# Altium PCB S6_Main_hv3.PcbDoc
Units mm, origin at the board's own origin, x right, y up, seen from the top; angles counter-clockwise.
Board outline 75 x 64 mm, 4 copper layers (Top Layer, GND, VCC, Bottom Layer), stack 1.606 mm thick; 128 components, 72 nets, 443 pads, 232 vias.
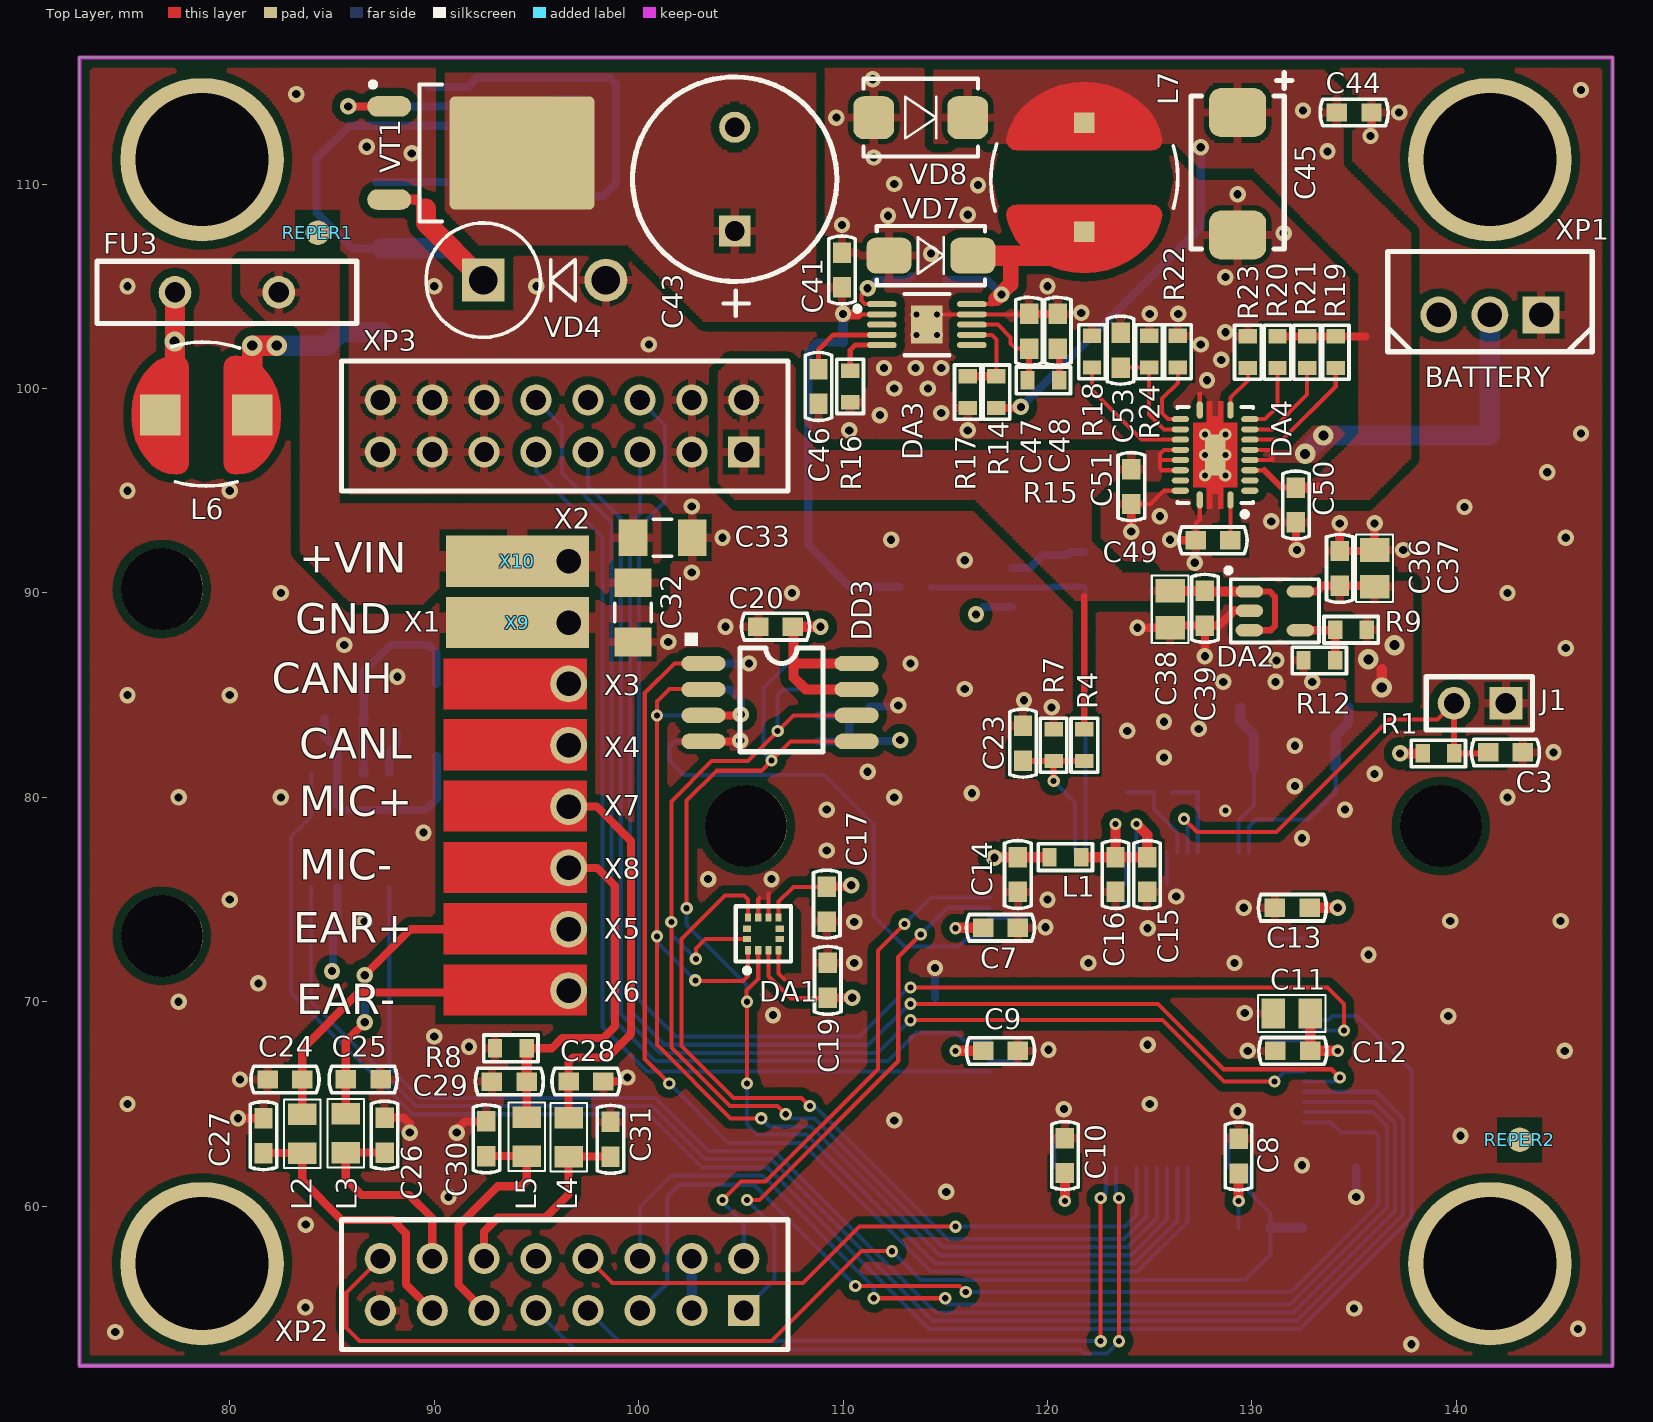
[diagram p0: Top Layer view]
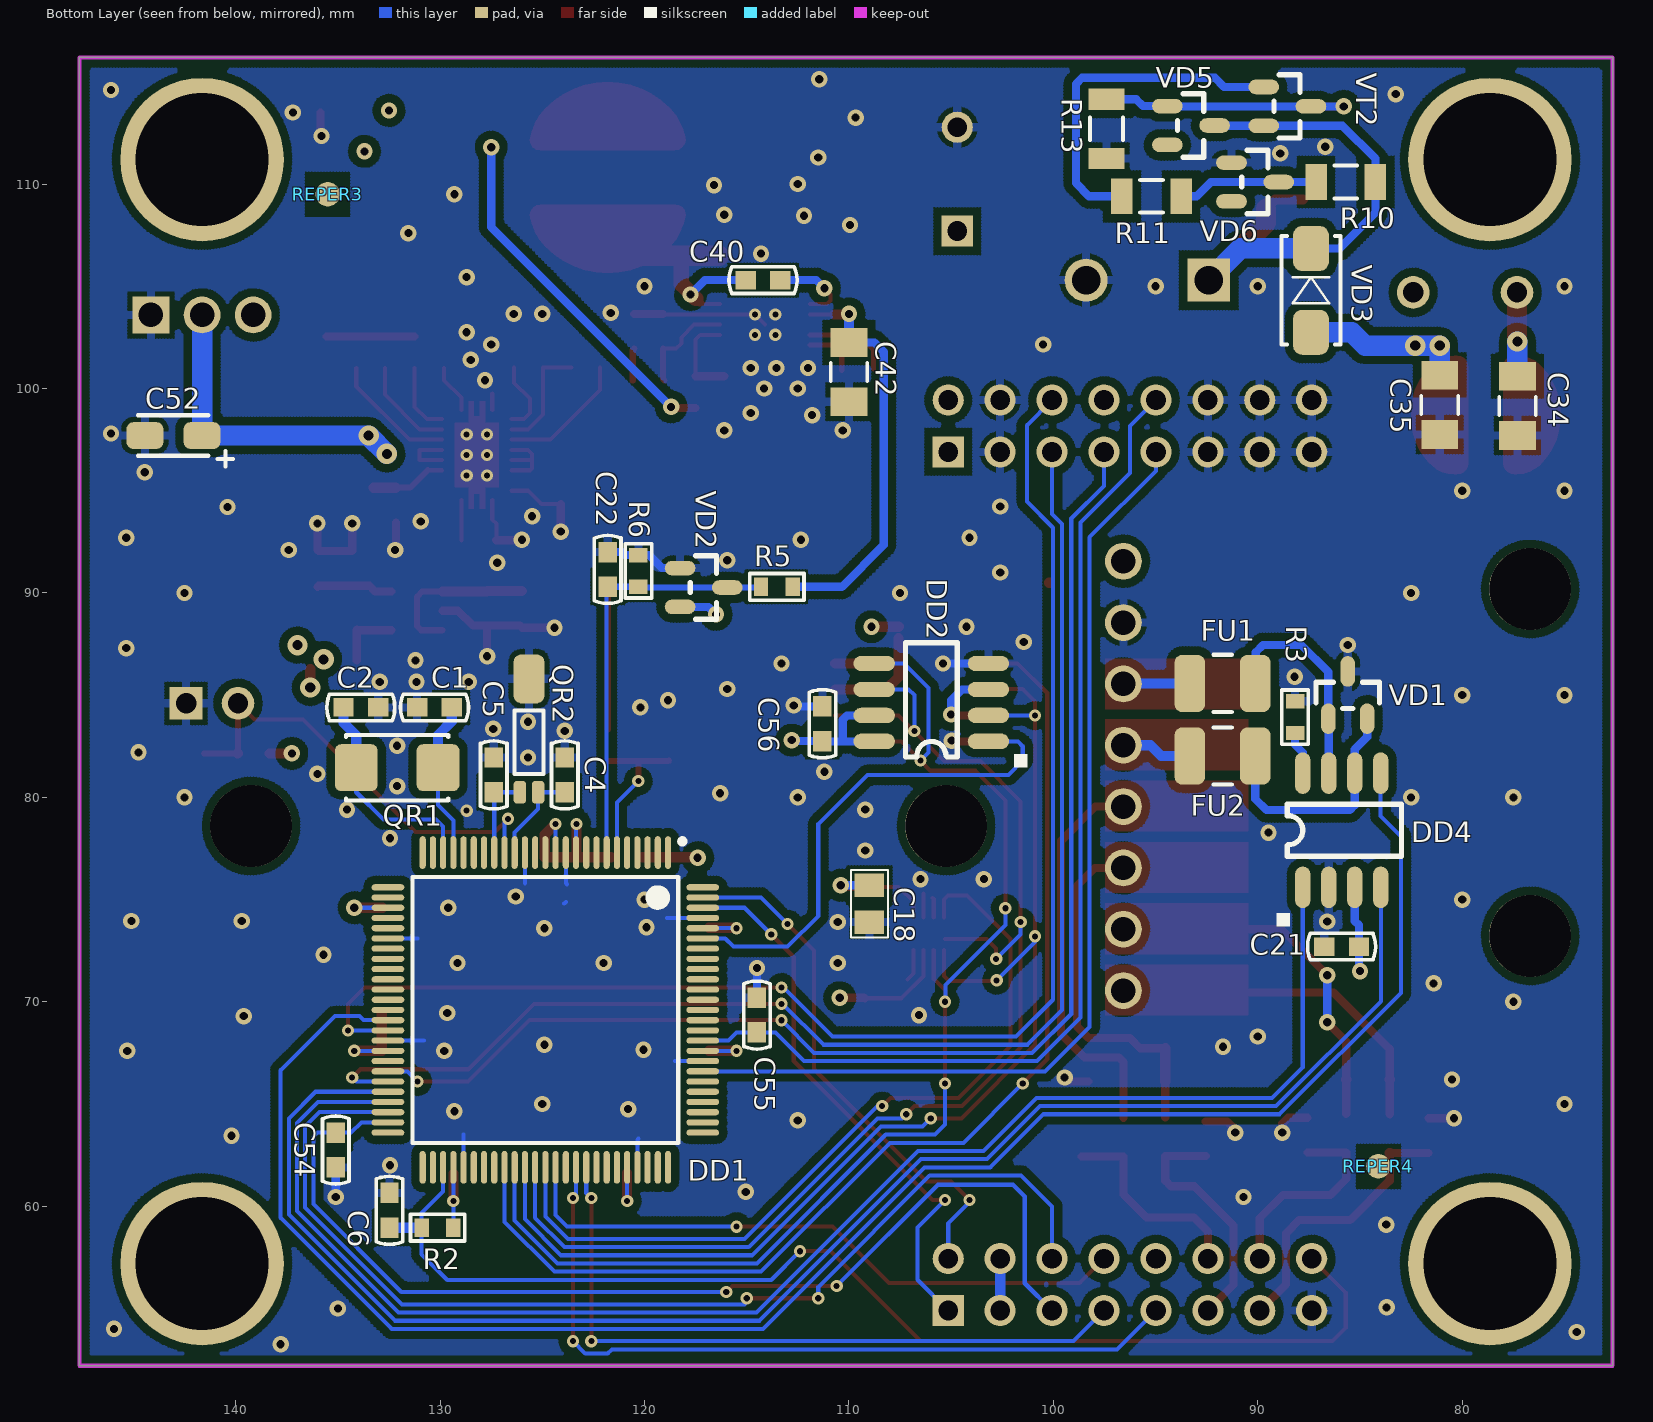
[diagram p1: Bottom Layer view, seen from below]
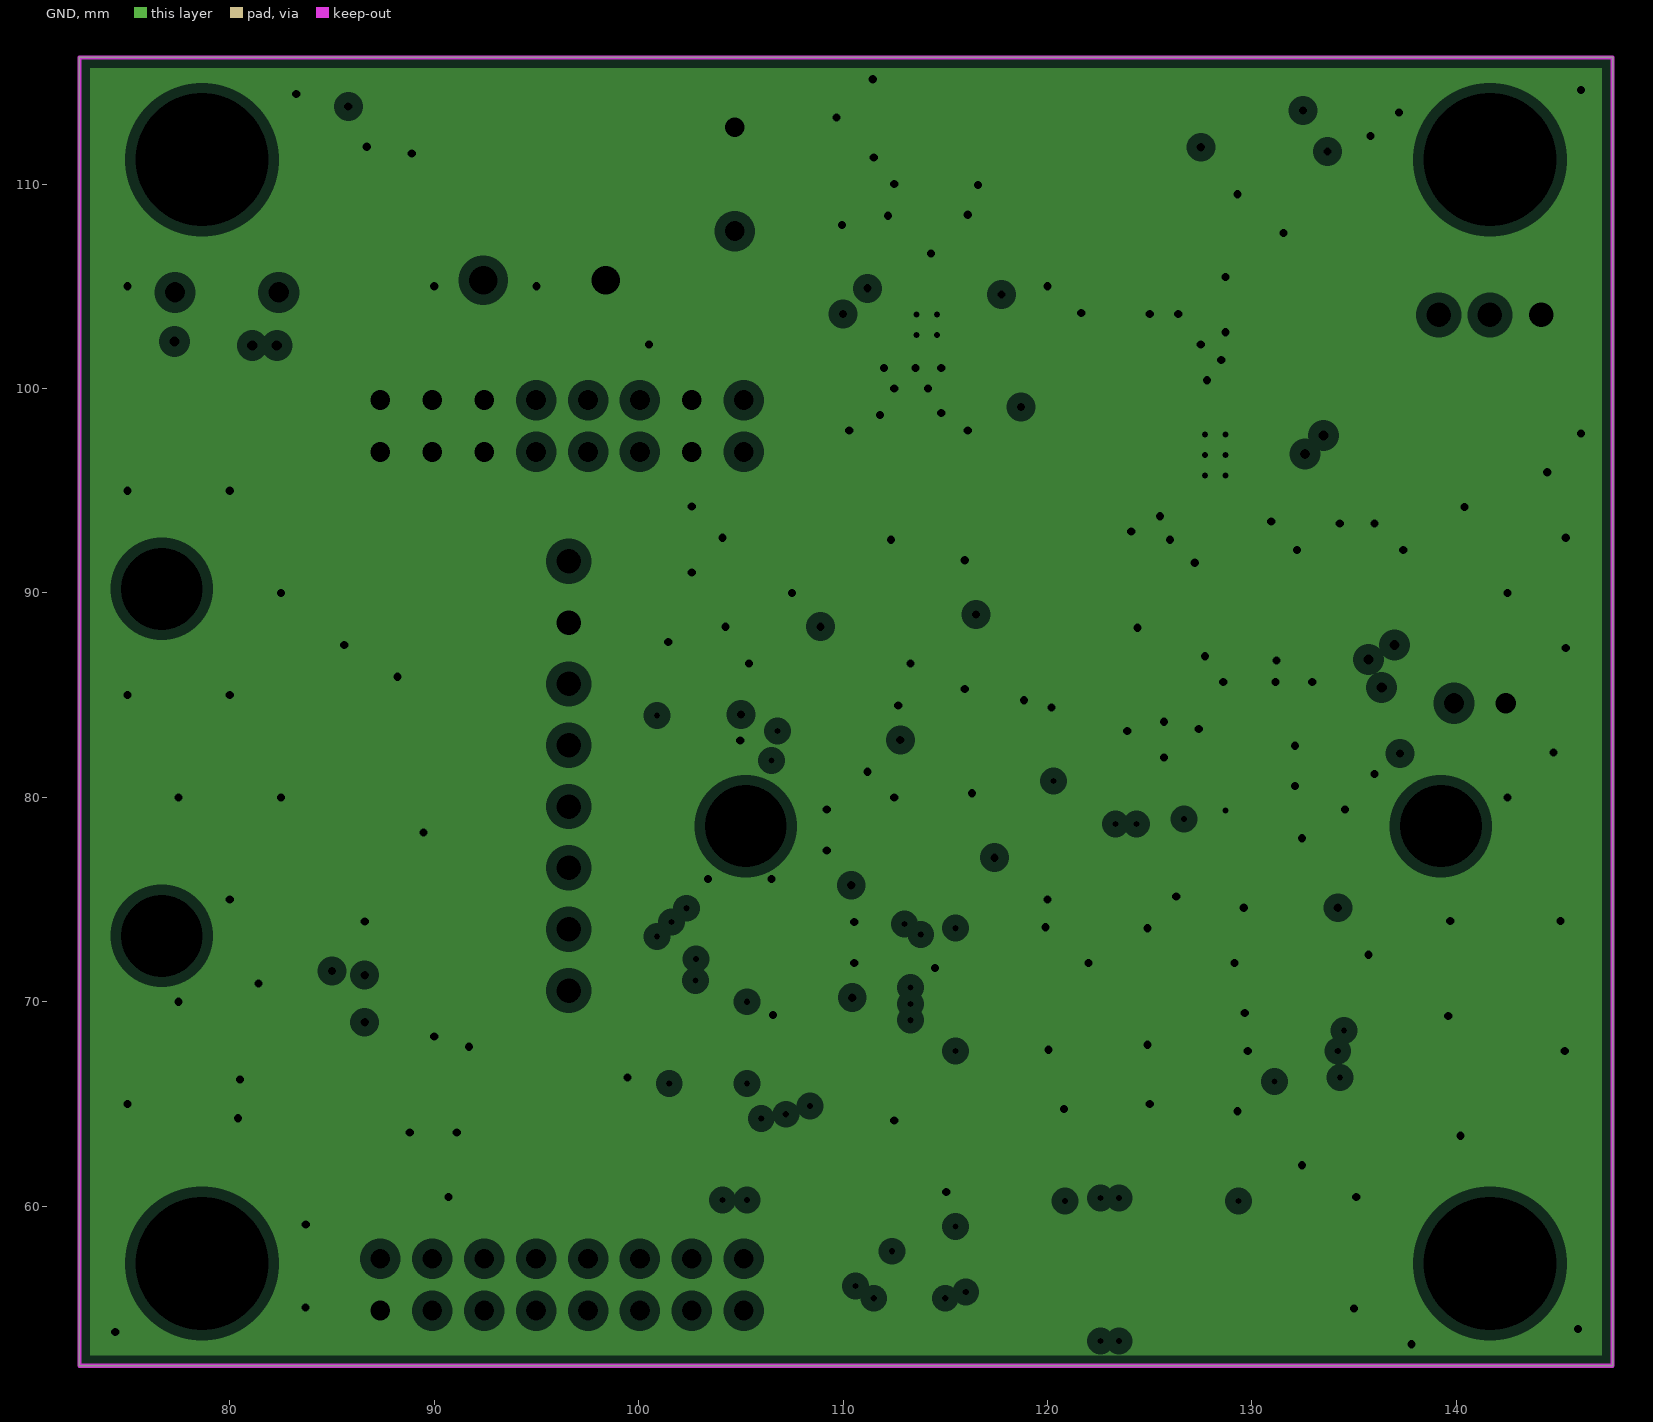
[diagram p2: GND, clearances drawn from the general rule]
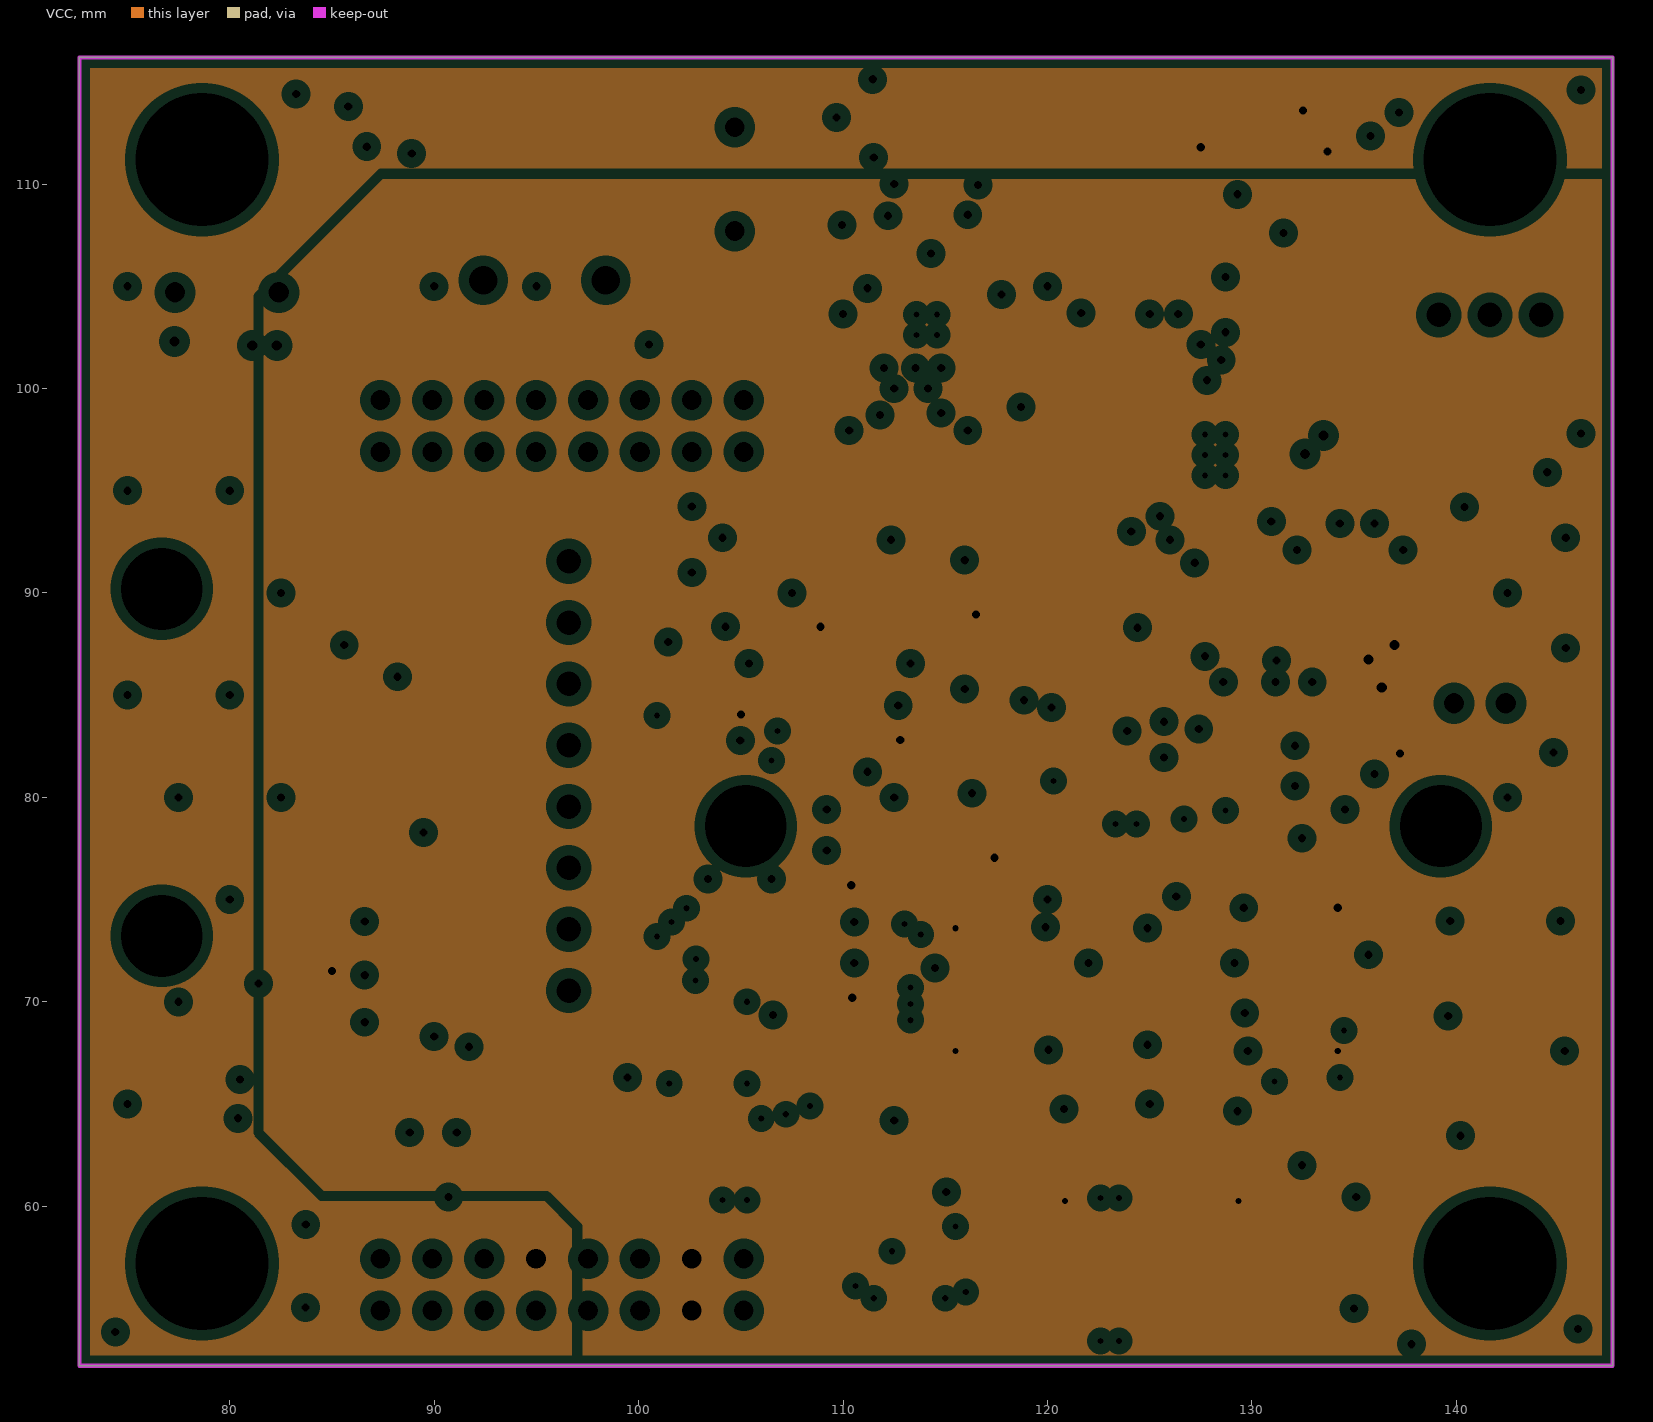
[diagram p3: VCC, clearances drawn from the general rule]

## Layer stack, top to bottom
Top Solder: solder mask 0.0102, Solder Resist, Dk 3.5
Top Layer: signal copper 0.035
Dielectric 1: prepreg 0.25, FR-4, Dk 4.2
GND: plane copper 0.018, net GND
Dielectric 3: core 1, FR-4, Dk 4.2
VCC: plane copper 0.018, net (Multiple Nets)
Dielectric 2: prepreg 0.25, FR-4, Dk 4.2
Bottom Layer: signal copper 0.035
Bottom Solder: solder mask 0.0102, Solder Resist, Dk 3.5

## Board outline
72.644,52.197 147.644,52.197 147.644,116.197 72.644,116.197

## Design rules (kind name [scope] priority, off if disabled: settings)
Clearance Clearance_keepout [IsKeepOut] p1: gap=0.4 ignorepadtopadclearanceinfootprint=FALSE
Clearance Clearance_Poly [All vs InPoly] p2: gap=0.4 ignorepadtopadclearanceinfootprint=FALSE
Clearance [All] p3: gap=0.2 ignorepadtopadclearanceinfootprint=FALSE
ComponentClearance [All] p1: gap=0 collisioncheckmode=3 verticalgap=0 showdistances=FALSE
HoleSize [All] p1: absolutevalues=TRUE maxlimit=10 minlimit=0.025 maxpercent=80.000 minpercent=20.000
PlaneClearance [All] p1: clearance=0.508
PlaneConnect [All] p1: planeconnectstyle=Relief reliefexpansion=0.2 reliefentries=4 reliefconductorwidth=0.254 reliefairgap=0.2
PolygonConnect PolygonConnect_2 [IsPad And (PadYSize_TopLayer > 1.5) And InComponent(DA3)] p1: connectstyle=Direct reliefconductorwidth=0.254 reliefentries=4 polygonreliefangle="90 Angle" airgapwidth=0.254
PolygonConnect PolygonConnect_3 [InComponent('X9') OR InComponent('X10')] p2: connectstyle=Relief reliefconductorwidth=1 reliefentries=4 polygonreliefangle="90 Angle" airgapwidth=0.3
PolygonConnect PolygonConnect_1 [All vs IsVia OR InComponent('L6') OR InComponent('VT1') AND InNet('VIN_F')] p3: connectstyle=Direct reliefconductorwidth=0.254 reliefentries=4 polygonreliefangle="90 Angle" airgapwidth=0.254
PolygonConnect [All] p4: connectstyle=Relief reliefconductorwidth=0.4 reliefentries=4 polygonreliefangle="90 Angle" airgapwidth=0.25
RoutingVias [All] p1: holewidth=0.4 width=0.8 viastyle="Through Hole" minholewidth=0.3 minwidth=0.6 maxholewidth=0.5 maxwidth=1
SilkToSilkClearance [All] p1: silktosilkclearance=0
SolderMaskExpansion SolderMaskExpansion_via [IsVia] p1: expansion=-10
SolderMaskExpansion [All] p2: expansion=0.076
Width [All] p1: maxlimit=3 minlimit=0.2 preferedwidth=0.5
25 further rules are at their usual default settings.

## Classes and differential pairs
component class Power: C32 C33 C34 C35 C36 C37 C38 C39 C40 C41 C42 C43 C44 C45 C46 C47 C48 C49 C50 C51 C52 C53 DA2 DA3 DA4 FU3 L6 L7 R9 R10 R11 R12 R13 R14 R15 R16 R17 R18 R19 R20 R21 R22 R23 R24 VD3 VD4 VD5 VD6 VD7 VD8 VT1 VT2 XP1
component class IO: C17 C18 C19 DA1 X1 X2 X3 X4 X5 X6 X7 X8 X9 X10 XP2 XP3
component class Interface: C21 C22 C23 C24 C25 C26 C27 C28 C29 C30 C31 DD4 FU1 FU2 L2 L3 L4 L5 R3 R4 R5 R6 R7 R8 VD1 VD2
component class CPU: C1 C2 C3 C4 C5 C6 C7 C8 C9 C10 C11 C12 C13 C14 C15 C16 C20 C54 C55 C56 DD1 DD2 DD3 J1 L1 QR1 QR2 R1 R2 REPER1 REPER2 REPER3 REPER4

## Components (designator, comment, footprint, x,y, rotation, side; value= is the part's Value field where it differs from the comment)
C1 "22pF" CC0603#1 130.275,84.4 r180 bottom
C2 "22pF" CC0603#1 133.875,84.4 r0 bottom
C3 "220pF" CC0603#1 142.4,82.2 r180 top
C4 "22pF" CC0603#1 123.9,81.1 r270 bottom
C5 "22pF" CC0603#1 127.375,81.1 r270 bottom
C6 "220pF" CC0603#1 132.475,59.8 r270 bottom
C7 "0.1uF" CC0603#1 117.7,73.625 r180 top
C8 "0.1uF" CC0603#1 129.35,62.45 r270 top
C9 "0.1uF" CC0603#1 117.7,67.6 r180 top
C10 "0.1uF" CC0603#1 120.85,62.475 r270 top
C11 "10uF" CC0805 131.95,69.425 r0 top
C12 "0.1uF" CC0603#1 132,67.6 r0 top
C13 "0.1uF" CC0603#1 131.975,74.6 r0 top
C14 "0.1uF" CC0603#1 118.55,76.225 r90 top
C15 "0.1uF" CC0603#1 124.875,76.225 r90 top
C16 "0.1uF" CC0603#1 123.325,76.225 r90 top
C17 "0.1uF" CC0603#1 109.2,74.775 r270 top
C18 "10uF 6.3V" CC0805 109,74.8 r90 bottom
C19 "0.1uF" CC0603#1 109.25,71.05 r90 top
C20 "0.1uF" CC0603#1 106.7,88.35 r180 top
C21 "0.1 uF" CC0603#1 85.9,72.7 r0 bottom
C22 "0.1 uF" CC0603#1 121.8,91.15 r90 bottom
C23 "0.1 uF" CC0603#1 118.8,82.65 r90 top
C24 "1 nF" CC0603#1 82.7,66.2 r0 top
C25 "1 nF" CC0603#1 86.525,66.202 r180 top
C26 "22 pF" CC0603#1 87.575,63.475 r270 top
C27 "22 pF" CC0603#1 81.65,63.45 r270 top
C28 "22 pF" CC0603#1 97.425,66.1 r180 top
C29 "22 pF" CC0603#1 93.675,66.098 r0 top
C30 "1 nF" CC0603#1 92.55,63.3 r270 top
C31 "1 nF" CC0603#1 98.625,63.275 r270 top
C32 "0.1uF" CC1206 99.725,89.05 r90 top
C33 "10nF" CC1206 101.175,92.7 r180 top
C34 "0.1uF" CC1206 77.3,99.15 r90 bottom
C35 "0.1uF" CC1206 81.1,99.2 r90 bottom
C36 "0.1uF" CC0603#1 134.3,91.2 r90 top
C37 "10uF 6.3V" CC0805 136,91.2 r270 top
C38 "10uF 6.3V" CC0805 126,89.2 r90 top
C39 "0.1uF" CC0603#1 127.7,89.25 r270 top
C40 "0.1 uF" CC0603#1 114.2,105.3 r0 bottom
C41 "0.1 uF" CC0603#1 109.95,105.8 r270 top
C42 "1uF 50V" CC1206 110,100.8 r90 bottom
C43 "220uF x 50V" CC16X10_CAP0.5(1)(Primary) 104.7,107.7 r90 top
C44 "0.1 uF" CC0603#1 135,113.5 r0 top
C45 "470uF x 6.3V" TAJ-D-1M 129.3,110.5 r90 top
C46 "10 nF" CC0603#1 108.8,100.1 r90 top
C47 "330pF" CC0603#1 119.1,102.8 r270 top
C48 "560 pF" CC0603#1 120.5,102.8 r270 top
C49 "0.1 uF" CC0603#1 128.1,92.575 r180 top
C50 "1 uF" CC0603#1 132.15,94.3 r270 top
C51 "1 uF" CC0603#1 124.1,95.2 r270 top
C52 "47uF x 6.3V" TAJ-A_M 141.644,97.7 r180 bottom value={Value}
C53 "0.1 uF" CC0603#1 123.575,101.875 r90 top
C54 "33pF" CC0603#2 135.1,62.75 r90 bottom
C55 "33pF" CC0603#2 114.501,69.35 r270 bottom
C56 "0.1uF" CC0603#2 111.3,83.6 r90 bottom
DA1 "KX022-1020" LGA-12 106.1,73.325 r90 top
DA2 "AP2210K-ADJTRG1" SOT23-5 131.125,89.125 r180 top
DA3 "TPS54260DGQ" S-PDSO-G10 111.9,104.125 r270 top
DA4 "BQ24070" P-PQFP-N20 128.2,96.75 r90 top
DD1 "LPC1765FBD100" TQFP-100 118.85,77.3 r270 bottom
DD2 "M95256-WMN6" SO-8#1 103.175,82.74 r90 bottom
DD3 "IS25LP016D-JBLE" EIAJ_SO8 103.175,86.55 r0 top
DD4 "SN65HVD234D" SO-8#2 87.8,75.6 r180 bottom
FU1 "MICROSMD010F-2" RC1210 91.725,85.575 r0 bottom
FU2 "MICROSMD010F-2" RC1210 91.725,82.025 r0 bottom
FU3 "RXE-110" RXE-110 82.4,104.7 r180 top
J1 "PLS-02" PLS-02 142.425,84.6 r180 top
L1 "10uH" L0603 120.1,77.075 r0 top
L2 "BLM21PG221" RC0805 83.55,63.55 r90 top
L3 "BLM21PG221" RC0805 85.675,63.575 r90 top
L4 "BLM21PG221" RC0805 96.575,63.375 r270 top
L5 "BLM21PG221" RC0805 94.525,63.4 r270 top
L6 "47uH" SDR0603 76.6,98.7 r0 top
L7 "15uH" SDR0805 121.8,110.325 r90 top
QR1 "12MHz" AC5032_2 132.1,81.45 r0 bottom
QR2 "MS3V-T1R" MS3V-T1R 126.1,80.25 r90 bottom
R1 "10k" RC0603 139.125,82.15 r0 top
R2 "10k" RC0603 130.125,58.95 r0 bottom
R3 "0" RC0603 88.175,83.925 r90 bottom
R4 "12k 1%" RC0603 121.8,82.55 r90 top
R5 "120k" RC0603 113.525,90.3 r180 bottom
R6 "10k" RC0603 120.3,91.075 r90 bottom
R7 "20k 1%" RC0603 120.3,82.55 r270 top
R8 "1k" RC0603 93.75,67.725 r0 top
R9 "11k 1%" RC0603 134.85,88.2 r0 top
R10 "220k" RC1206 85.7,110.1 r180 bottom
R11 "220k" RC1206 95.2,109.4 r0 bottom
R12 "16k 1%" RC0603 133.3,86.7 r0 top
R13 "220k" RC1206 97.4,112.7 r270 bottom
R14 "48.7k 1%" RC0603 117.5,99.825 r270 top
R15 "12k" RC0603 119.8,100.4 r180 top
R16 "240k" RC0603 110.35,100.1 r90 top
R17 "11k 1%" RC0603 116.1,99.825 r90 top
R18 "51k" RC0603 122.175,101.799 r270 top value={Value}
R19 "100k" RC0603 134.1,101.774 r270 top
R20 "100k" RC0603 131.25,101.774 r270 top
R21 "100k" RC0603 132.7,101.774 r270 top
R22 "10k" RC0603 126.375,101.799 r270 top
R23 "2k" RC0603 129.8,101.774 r270 top
R24 "33k" RC0603 124.975,101.799 r270 top
REPER1 "REPER1.2" REPER1.2 84.3,107.625 r90 top
REPER2 "REPER1.2" REPER1.2 143.1,63.25 r90 top
REPER3 "REPER1.2" REPER1.2 135.5,109.5 r90 bottom
REPER4 "REPER1.2" REPER1.2 84.1,61.95 r90 bottom
VD1 "PESD2CAN" SOT-23(123) 86.55,83.85 r270 bottom
VD2 "BAT54S" SOT-23(GSD) 118.261,91.216 r0 bottom
VD3 "GS1M" SMA 87.4,104.8 r270 bottom value={Value}
VD4 "1.5KE150A" DO-201 98.4,105.3 r180 top
VD5 "BZX84C15" SOT-23(123) 94.424,113.816 r0 bottom value={Value}
VD6 "BZX84C39" SOT-23(123) 91.286,111.05 r0 bottom value={Value}
VD7 "SK34SMA" SMA 114.3,106.5 r180 top value={Value}
VD8 "SMBJ5.0A" SMB 113.8,113.25 r180 top
VT1 "FQD5P20TM" D-PAK(TO-252AA) 92.3,111.52 r0 top
VT2 "BC807-40" SOT-23(123) 89.711,114.75 r0 bottom
X1 "PIN_1.2mm" PIN_1.2mm 96.575,88.55 r0 top
X2 "PIN_1.2mm" PIN_1.2mm 96.575,91.55 r0 top
X3 "PIN_1.2mm" PIN_1.2mm 96.575,85.55 r0 top
X4 "PIN_1.2mm" PIN_1.2mm 96.575,82.55 r0 top
X5 "PIN_1.2mm" PIN_1.2mm 96.575,73.55 r0 top
X6 "PIN_1.2mm" PIN_1.2mm 96.575,70.55 r0 top
X7 "PIN_1.2mm" PIN_1.2mm 96.575,79.55 r0 top
X8 "PIN_1.2mm" PIN_1.2mm 96.575,76.55 r0 top
X9 "PIN_2.5x4mm_SMD" PIN_2.5x4mm_SMD 94.069,88.55 r0 top
X10 "PIN_2.5x4mm_SMD" PIN_2.5x4mm_SMD 94.069,91.55 r0 top
XP1 "MW03D" MW03D 144.144,103.597 r180 top
XP2 "PBD-16" PBD16 105.144,54.897 r180 top
XP3 "PBD-16" PBD16 105.144,96.897 r180 top

## Footprints (in the part's own frame and the unit in brackets; to place one, negate y for a bottom-side part, rotate by r counter-clockwise, add the part's x,y. Pads: shape width x height; smd on the part's side, far side on the other; paste and mask are expansions set on the pad)
AC5032_2 [mm]
  rrect30% 2.1x2.3 smd mask+0.06: 1(-2,0) 2(2,0)
  silkscreen extent -2.5,-1.6 2.5,1.6
CC16X10_CAP0.5(1)(Primary) [mil]
  round 60 hole 38 mask+2.36: 1(200,0)
  rect 60x60 hole 38 mask+2.36: 2(0,0)
  silkscreen extent -97,-197 297,197
CC0603#1 [mm]
  rect 1x0.9 smd paste-25.4 mask+0.06: 1(-0.85,0) 2(0.85,0)
  silkscreen extent -1.66,-0.65 1.66,0.65
CC0603#2 [mm]
  rect 1x0.9 smd paste-25.4: 1(-0.85,0) 2(0.85,0)
  silkscreen extent -1.66,-0.65 1.66,0.65
CC0805 [mm]
  rect 1.15x1.45 smd paste-25.4 mask+0.06: 1(-0.9,0) 2(0.9,0)
  silkscreen extent -1.65,-0.9 1.65,0.9
CC1206 [mm]
  rect 1.4x1.8 smd paste-25.4 mask+0.06: 1(-1.45,0) 2(1.45,0)
  silkscreen extent -0.45,-0.9 0.45,0.9
D-PAK(TO-252AA) [mm]
  oval 2.15x1 smd paste+0.076 mask+0.076: 1(-4.5,2.28) 2(-4.5,-2.28)
  rrect10% 7.1x5.55 smd paste-4: 3(2,0)
  silkscreen extent -5.42,-3.35 -1.92,3.47
DO-201 [mm]
  round 2.1 hole 1.4 mask+0.06: 1(0,0)
  rect 2.1x2.1 hole 1.4 mask+0.06: 2(6,0)
  silkscreen extent 1.5,-2.8 8.8,2.8
EIAJ_SO8 [mil]
  oval 85x29.53 smd mask+2.36: 1(0,0) 2(0,-50) 3(0,-100) 4(0,-150) 5(295,-150) 6(295,-100) 7(295,-50) 8(295,0)
  silkscreen extent -36,-170 230,59
L0603 [mm]
  rect 0.7x0.9 smd paste-25.4 mask+0.06: 1(0,0) 2(1.549,0)
  silkscreen extent -0.55,-0.65 2.1,0.65
LGA-12 [mm]
  rect 0.4x0.3 smd mask+0.06: 1(-0.8,0.75) 2(-0.8,0.25) 3(-0.8,-0.25) 4(-0.8,-0.75) 7(0.8,-0.75) 8(0.8,-0.25) 9(0.8,0.25) 10(0.8,0.75)
  rect 0.3x0.4 smd mask+0.06: 5(-0.25,-0.8) 6(0.25,-0.8) 11(0.25,0.8) 12(-0.25,0.8)
  silkscreen extent -1.92,-1.35 1.35,1.35
MS3V-T1R [mm]
  rrect50% 1.1x0.6 smd mask+0.06: 1(0,0) 2(0,-0.9)
  rrect50% 2.4x1.5 smd mask+0.06: 3(5.55,-0.45)
  silkscreen extent 0.9,-1.15 4,0.25
MW03D [mm]
  rect 1.8x1.8 hole 1.2 mask+0.06: 1(0,0)
  round 1.8 hole 1.2 mask+0.06: 2(2.5,0) 3(5,0)
  silkscreen extent -2.5,-3.1 7.5,1.8
P-PQFP-N20 [mm]
  oval 0.85x0.3 smd mask+0.06: 1(-2.2,-0.75) 10(2.2,-0.75) 11(2.2,0.75) 20(-2.2,0.75)
  oval 0.3x0.85 smd mask+0.06: 2(-1.75,-1.7) 3(-1.25,-1.7) 4(-0.75,-1.7) 5(-0.25,-1.7) 6(0.25,-1.7) 7(0.75,-1.7) 8(1.25,-1.7) 9(1.75,-1.7) 12(1.75,1.7) 13(1.25,1.7) 14(0.75,1.7) 15(0.25,1.7) 16(-0.25,1.7) 17(-0.75,1.7) 18(-1.25,1.7) 19(-1.75,1.7)
  rect 2x1 smd paste-25.4 mask+0.06: 21(0,0)
  Top Layer region: -1.575,-1.075 1.575,-1.075 1.575,-0.4 2.625,-0.4 2.625,-0.15 1.9,-0.15 1.9,0.15 2.625,0.15 2.625,0.4 1.575,0.4 1.575,1.075 -1.575,1.075 -1.575,0.4 -2.625,0.4 -2.625,0.15 -1.9,0.15 -1.9,-0.15 -2.625,-0.15 -2.625,-0.4 -1.575,-0.4
  silkscreen extent -3.02,-1.85 2.35,1.85
PBD16 [mil]
  rect 60x60 hole 38 mask+2.36: 1(0,0)
  round 60 hole 38 mask+2.36: 2(0,-100) 3(100,0) 4(100,-100) 5(200,0) 6(200,-100) 7(300,0) 8(300,-100) 9(400,0) 10(400,-100) 11(500,0) 12(500,-100) 13(600,0) 14(600,-100) 15(700,0) 16(700,-100)
  silkscreen extent -85,-175 775,75
PIN_1.2mm [mm]
  round 1.8 hole 1.2 mask+0.06: 1(0,0)
PIN_2.5x4mm_SMD [mm]
  rect 7x2.5 smd paste-10 mask+0.06: 1(0,0)
PLS-02 [mm]
  rect 1.6x1.6 hole 1 mask+0.06: 1(0,0)
  round 1.6 hole 1 mask+0.06: 2(2.54,0)
  silkscreen extent -1.3,-1.3 3.9,1.3
RC0603 [mm]
  rect 0.7x0.9 smd paste-25.4 mask+0.06: 1(-0.775,0) 2(0.774,0)
  silkscreen extent -1.32,-0.65 1.33,0.65
RC0805 [mm]
  rect 1.05x1.4 smd paste-25.4 mask+0.06: 1(-0.95,0) 2(0.95,0)
  silkscreen extent -1.67,-0.89 1.67,0.89
RC1206 [mm]
  rect 1.05x1.75 smd paste-25.4 mask+0.06: 1(-1.45,0) 2(1.45,0)
  silkscreen extent -0.55,-0.8 0.55,0.8
RC1210 [mm]
  rrect50% 1.5x2.8 smd mask+0.06: 1(-1.6,0) 2(1.6,0)
  silkscreen extent -0.45,-1.4 0.45,1.4
REPER1.2 [mm]
  round 1.2 smd paste-25.4 mask+0.06: 1(0,0)
  Top Layer pour cut-out: -1.2,-1.2 1.2,-1.2 1.2,1.2 -1.2,1.2
RXE-110 [mm]
  round 1.6 hole 1 mask+0.06: 1(0,0) 2(5.08,0)
  silkscreen extent -3.81,-1.52 8.89,1.52
S-PDSO-G10 [mm]
  oval 0.3x1.45 smd: 1(0,0) 2(0.5,0) 3(1,0) 4(1.5,0) 5(2,0) 6(2,4.4) 7(1.5,4.4) 8(1,4.4) 9(0.5,4.4) 10(0,4.4)
  rect 1.85x1.55 smd: 11(1,2.2)
  silkscreen extent -0.5,-1.32 2.5,3.3
SDR0603 [mm]
  rect 2x2 smd paste-25.4 mask+0.06: 1(0,0) 2(4.5,0)
  Top Layer region: 3.65,2.9 3.48,2.873 3.327,2.795 3.205,2.673 3.127,2.52 3.1,2.35 3.1,-2.35 3.127,-2.52 3.205,-2.673 3.327,-2.795 3.48,-2.873 3.65,-2.9 3.824,-2.9 4.119,-2.871 4.402,-2.785 4.663,-2.645 4.892,-2.458 5.002,-2.348 5.275,-2.035 5.502,-1.687 5.68,-1.312 5.681,-1.31 5.802,-0.934 5.875,-0.545 5.9,-0.15 5.9,0.183 5.877,0.556 5.807,0.924 5.693,1.28 5.689,1.288 5.505,1.679 5.268,2.04 4.984,2.366 4.908,2.442 4.671,2.637 4.401,2.781 4.107,2.87 3.802,2.9
  Top Layer region: 0.85,-2.9 1.02,-2.873 1.173,-2.795 1.295,-2.673 1.373,-2.52 1.4,-2.35 1.4,2.35 1.373,2.52 1.295,2.673 1.173,2.795 1.02,2.873 0.85,2.9 0.676,2.9 0.381,2.871 0.098,2.785 -0.163,2.645 -0.392,2.458 -0.502,2.348 -0.775,2.035 -1.002,1.687 -1.18,1.312 -1.181,1.31 -1.302,0.934 -1.375,0.545 -1.4,0.15 -1.4,-0.183 -1.377,-0.556 -1.307,-0.924 -1.193,-1.28 -1.189,-1.288 -1.005,-1.679 -0.768,-2.04 -0.484,-2.366 -0.408,-2.442 -0.171,-2.637 0.099,-2.781 0.393,-2.87 0.698,-2.9
  silkscreen extent 0.58,-3.47 3.88,3.57
SDR0805 [mm]
  rect 1x1 smd paste-25.4 mask+0.06: 1(-2.667,0) 2(2.667,0)
  Top Layer region: -1.327,3.319 -1.362,3.503 -1.461,3.66 -1.612,3.771 -1.792,3.818 -1.977,3.797 -2.318,3.69 -2.706,3.535 -3.065,3.321 -3.387,3.053 -3.392,3.047 -3.771,2.627 -4.09,2.16 -4.345,1.654 -4.53,1.119 -4.642,0.565 -4.68,0 -4.642,-0.565 -4.53,-1.119 -4.345,-1.654 -4.09,-2.16 -3.771,-2.627 -3.392,-3.047 -3.381,-3.059 -3.063,-3.323 -2.709,-3.534 -2.325,-3.688 -1.996,-3.791 -1.806,-3.813 -1.62,-3.764 -1.465,-3.65 -1.363,-3.488 -1.327,-3.299
  Top Layer region: 1.327,-3.319 1.362,-3.503 1.461,-3.66 1.612,-3.771 1.792,-3.818 1.977,-3.797 2.318,-3.69 2.706,-3.535 3.065,-3.321 3.387,-3.053 3.392,-3.047 3.771,-2.627 4.09,-2.16 4.345,-1.654 4.53,-1.119 4.642,-0.565 4.68,0 4.642,0.565 4.53,1.119 4.345,1.654 4.09,2.16 3.771,2.627 3.392,3.047 3.381,3.059 3.063,3.323 2.709,3.534 2.325,3.688 1.996,3.791 1.806,3.813 1.62,3.764 1.465,3.65 1.363,3.488 1.327,3.299
  silkscreen extent -1.66,-4.57 1.64,4.57
SMA [mm]
  rrect50% 2.2x1.75 smd: 1(2.05,0) 2(-2.05,0)
  silkscreen extent -2.65,-1.45 2.65,1.45
SMB [mm]
  rrect50% 2x2.1 smd mask+0.06: 1(2.3,0) 2(-2.3,0)
  silkscreen extent -2.8,-1.9 2.8,1.9
SO-8#1 [mil]
  oval 29.53x80 smd: 1(0,0) 2(50,0) 3(100,0) 4(150,0) 5(150,220) 6(100,220) 7(50,220) 8(0,220)
  silkscreen extent -50,-75 190,160
SO-8#2 [mil]
  oval 29.53x80 smd mask+2.36: 1(0,0) 2(50,0) 3(100,0) 4(150,0) 5(150,220) 6(100,220) 7(50,220) 8(0,220)
  silkscreen extent -50,-75 190,160
SOT23-5 [mm]
  oval 1.35x0.6 smd: 1(1.25,-0.95) 2(1.25,0) 3(1.25,0.95) 4(-1.25,0.95) 5(-1.25,-0.95)
  silkscreen extent -2.16,-2.1 2.4,1.55
SOT-23(123) [mm]
  oval 1.5x0.713 smd: 1(0,0) 2(0,1.9) 3(-2.311,0.95)
  silkscreen extent -1.78,-0.6 -0.5,2.5
SOT-23(GSD) [mm]
  oval 1.5x0.713 smd: 1(0,0) 2(0,1.9) 3(-2.311,0.95)
  silkscreen extent -1.78,-0.6 -0.5,2.5
TAJ-A_M [mm]
  rrect50% 1.8x1.3 smd: 1(0,0) 2(-2.794,0)
  silkscreen extent -3.12,-1.52 1.52,0.99
TAJ-D-1M [mm]
  rrect50% 2.4x2.8 smd: 1(2.997,0) 2(-2.997,0)
  silkscreen extent -3.68,-2.67 4.95,2.29
TQFP-100 [mm]
  oval 1.6x0.3 smd mask+0.06: 1(0,0) 2(0,-0.5) 3(0,-1) 4(0,-1.5) 5(0,-2) 6(0,-2.5) 7(0,-3) 8(0,-3.5) 9(0,-4) 10(0,-4.5) 11(0,-5) 12(0,-5.5) 13(0,-6) 14(0,-6.5) 15(0,-7) 16(0,-7.5) 17(0,-8) 18(0,-8.5) 19(0,-9) 20(0,-9.5) 21(0,-10) 22(0,-10.5) 23(0,-11) 24(0,-11.5) 25(0,-12) 51(15.4,-12) 52(15.4,-11.5) 53(15.4,-11) 54(15.4,-10.5) 55(15.4,-10) 56(15.4,-9.5) 57(15.4,-9) 58(15.4,-8.5) 59(15.4,-8) 60(15.4,-7.5) 61(15.4,-7) 62(15.4,-6.5) 63(15.4,-6) 64(15.4,-5.5) 65(15.4,-5) 66(15.4,-4.5) 67(15.4,-4) 68(15.4,-3.5) 69(15.4,-3) 70(15.4,-2.5) 71(15.4,-2) 72(15.4,-1.5) 73(15.4,-1) 74(15.4,-0.5) 75(15.4,0)
  oval 0.3x1.6 smd mask+0.06: 26(1.7,-13.7) 27(2.2,-13.7) 28(2.7,-13.7) 29(3.2,-13.7) 30(3.7,-13.7) 31(4.2,-13.7) 32(4.7,-13.7) 33(5.2,-13.7) 34(5.7,-13.7) 35(6.2,-13.7) 36(6.7,-13.7) 37(7.2,-13.7) 38(7.7,-13.7) 39(8.2,-13.7) 40(8.7,-13.7) 41(9.2,-13.7) 42(9.7,-13.7) 43(10.2,-13.7) 44(10.7,-13.7) 45(11.2,-13.7) 46(11.7,-13.7) 47(12.2,-13.7) 48(12.7,-13.7) 49(13.2,-13.7) 50(13.7,-13.7) 76(13.7,1.7) 77(13.2,1.7) 78(12.7,1.7) 79(12.2,1.7) 80(11.7,1.7) 81(11.2,1.7) 82(10.7,1.7) 83(10.2,1.7) 84(9.7,1.7) 85(9.2,1.7) 86(8.7,1.7) 87(8.2,1.7) 88(7.7,1.7) 89(7.2,1.7) 90(6.7,1.7) 91(6.2,1.7) 92(5.7,1.7) 93(5.2,1.7) 94(4.7,1.7) 95(4.2,1.7) 96(3.7,1.7) 97(3.2,1.7) 98(2.7,1.7) 99(2.2,1.7) 100(1.7,1.7)
  silkscreen extent -0.67,-12.5 14.2,0.82

## Part data
C1 C2 C3 C4 C5 C6 C7 C8 C9 C10 C12 C13 C14 C15 C16 C17 C19 C20 C21 C22 C23 C24 C25 C26 C27 C28 C29 C30 C31 C36 C39 C40 C41 C44 C46 C47 C48 C49 C50 C51 C53 C54 C55 C56: library part CC0603, "CC0603"
C11 C18 C37 C38: library part CC0805, "CC0805"
C32 C33 C34 C35 C42: library part CC1206, "CC1206"
C43: library part CAP0.5(1), "CAP0.5(1)"
C45: library part TAJ-D, "TAJ-D"
C52: library part TAJ-A, "TAJ-A"
DA2: library part MCP1824T-ADJE/OT, "300 mA, Low Voltage, Low Quiescent Current LDO Regulator, 5-Pin SOT-223, Extended Temperature, Tape and Reel", ComponentLink1Description="Manufacturer Link", ComponentLink1URL=http://www.microchip.com, ComponentLink2Description=Datasheet, ComponentLink2URL=http://ww1.microchip.com/downloads/en/DeviceDoc/22070a.pdf, ComponentLink3Description="Packaging Specification", ComponentLink3URL=http://ww1.microchip.com/downloads/en/PackagingSpec/00049AW.pdf, DatasheetVersion="revA, Aug-2007", PackageDescription="5-Lead Plastic Small Outline Transistor (DC) [SOT-223]", PackageReference=SOT-223-DC5, PackageVersion="revAW, Oct-2008", Published=29-Jan-2009, Publisher="Altium Limited"
DD1: library part LPC1768FBD100, "Cortex -M3 32-Bit Microcontroller, 512KB Flash, 64KB RAM, 100-Lead LQFP", ComponentLink1Description="Manufacturer Link", ComponentLink1URL=http://www.nxp.com/
DD2: "SPI EEPROM"
DD3: library part S25FL016A0LMFI01, "S25FL016A0LMFI01"
DD4: "CAN Transceiver"
FU1 FU2: library part MICROSMD, "MICROSMD"
L1: library part L0603, "L0603"
L6: library part SDR0603, "SDR0603"
L7: library part SDR0805, "SDR0805"
QR1: library part AC5032_2, "AC5032/2"
QR2: "CRYSTAL_32768 Hz"
R1 R2 R3 R4 R5 R6 R7 R8 R9 R12 R14 R15 R16 R17 R18 R19 R20 R21 R22 R23 R24: library part RC0603, "RC0603"
R10 R11 R13: library part RC1206, "RC1206"
VD1: "TVS for CAN"
VD2: "1.0 Ampere General Purpose Rectifier", ComponentField6="Published 8-Jun-2000, Modified 11-July-2000: SIM Model Added."
VD4: library part 1.5KE, "1.5KE"
VD5 VD6: library part BZX84, "Zener Voltage Regulator Diode"
VD7: "Schottky Rectifier"
VD8: library part SMBJ, "SMBJ"
VT1: library part IRFR9220, "HEXFET Power MOSFET", ComponentField7="Published 8-Jun-2000", OriginalName=IRLML5103
VT2: library part BC857B, "BC857B", ComponentField7="Published 29-Sep-2000", OriginalName=BC846BLT1

## Free pads (board coordinates)
  round 4 hole 4 unplated mask+0.06: 0(76.675,73.225) 0(76.675,90.197) 0(105.244,78.597) 0(139.244,78.597)
  round 8 hole 6.5 unplated mask+0.06: 0(78.644,57.197) 0(78.644,111.197) 0(141.644,57.197) 0(141.644,111.197)

## Via types
v1: diameter 0.8, hole 0.4, Top Layer to Bottom Layer, 170 vias
v2: diameter 0.6, hole 0.3, Top Layer to Bottom Layer, 54 vias
v3: diameter 1, hole 0.5, Top Layer to Bottom Layer, 8 vias

## Nets (pads, with @x,y where several pads share a name; then routed paths per layer and width w, separated by ;. In a path a pad name is that pad's centre, name@x,y a point inside that pad or via, vN(x,y) a via of type N, cw(c..) or ccw(c..) an arc to the next point about the centre after c; other vN are vias at no path point)
+3V: C7.2 C8.2 C9.2 C10.2 C11.2 C12.2 C13.2 C14.2 C17.1 C18.2 C19.1 C20.1 C21.1 C36.1 C37.2 C56.1 DA1.3 DA1.7 DA2.5 DD1.28 DD1.42 DD1.54 DD1.71 DD1.84 DD1.96 DD2.3 DD2.7 DD2.8 DD3.3 DD3.7 DD3.8 DD4.3 L1.1 R1.1 R2.1 R9.2 VD2.2 XP2.3 XP2.4 | length 71.2
  Top Layer w0.2: DA1.3 106.35,71.25 107.425,70.175 C19.1@109.225,70.175 ; DA1.7 106.85,74.9 107.575,75.625 C17.1
  Top Layer w0.4: DD3.3 104.96,84.01 v1(105,84.05) ; C17.1 110.325,75.625 v1(110.4,75.7) ; C19.1@109.225,70.175 C19.1 v1(110.45,70.2) ; DA2.5 133.175,90.075 133.45,90.35 C36.1 135.95,90.35 C37.2
  Top Layer w0.5: C20.1 v1(108.9,88.35) ; 107.575,87.8 107.575,86.55 ; DD3.7 108.17,85.28 107.575,85.875 107.575,86.55 ; DD3.8 107.575,86.55 ; v2(115.5,67.6) C9.2 ; v2(115.5,73.6) 115.525,73.625 C7.2 ; v1(117.4,77.05) 117.425,77.075 C14.2 L1.1 ; v2(120.85,60.25) C10.2 ; v2(129.35,60.25) C8.2 ; C13.2 v1(134.2,74.6) ; C11.2 C12.2 v2(134.2,67.6) ; v3(136.35,85.375) 136.35,86.275 ; v1(137.25,82.15) R1.1
  Bottom Layer w0.2: v2(115.5,67.6) DD1.84 ; v2(115.5,73.6) DD1.96 ; v2(120.85,60.25) DD1.71 ; R2.1 v2(129.35,60.25) DD1.54 ; DD1.42 v2(134.2,67.6) ; DD1.28 v1(134.2,74.6)
  Bottom Layer w0.4: v1(85,71.5) 85.05,71.55 C21.1 85.05,73.75 85.26,73.96 DD4.3 ; DD2.3 104.47,85.28 105,84.75 v1(105,84.05) ; DD2.8 110.3,82.74 ; DD2.7 110.09,84.01 110.3,83.8 110.3,82.74 ; C18.2 v1(110.4,75.7) ; v1(112.8,82.8) 112.75,82.75 C56.1 111.29,82.74 110.3,82.74 ; v1(116.5,88.95) 116.866,89.316 VD2.2
  Bottom Layer w0.5: XP2.3 XP2.4
  other v3: 135.7,86.75 136.975,87.45
CAN_D: DD1.47 DD4.1 | length 74.2
  Bottom Layer w0.2: DD4.1 87.8,66.8 89.3,65.3 100.82,65.3 103.42,62.7 106.631,62.7 114.531,54.8 132.031,54.8 137,59.769 137,64.066 135.966,65.1 DD1.47
CAN_EN: DD1.39 DD4.5 | length 88.7
  Bottom Layer w0.2: DD4.5@83.95,81.148 DD4.5 83.99,79.085 83,78.095 83,70.434 88.934,64.5 100.489,64.5 103.089,61.9 106.3,61.9 114.2,54 132.363,54 137.8,59.437 137.8,66.65 135.15,69.3 133.95,69.3 133.75,69.1 DD1.39
CAN_R: DD1.46 DD4.4 | length 77.7
  Bottom Layer w0.2: DD4.4 83.975,75.615 83.975,70.025 89.1,64.9 100.655,64.9 103.255,62.3 106.466,62.3 114.366,54.4 132.197,54.4 137.4,59.603 137.4,64.3 136.1,65.6 DD1.46
CANH: FU1.2 X3.1 | length 3.4
  Bottom Layer w0.5: FU1.2@93.403,85.497 FU1.2 96.55,85.575 X3.1
CANL: FU2.2 X4.1 | length 3.5
  Bottom Layer w0.5: FU2.2 94.725,82.025 95.25,82.55 X4.1
EAR_HF+: C26.2 L3.1 XP2.14 | length 10.2
  Top Layer w0.4: C26.2 L3.1 85.675,61.325 86.45,60.55 88.775,60.55 89.904,59.421 XP2.14
EAR_HF-: C27.2 L2.1 XP2.13 | length 13.7
  Top Layer w0.4: C27.2 L2.1 83.55,61.25 85.475,59.325 87.975,59.325 88.626,58.674 88.626,56.175 XP2.13
GND: C1.1 C2.1 C3.1 C4.1 C5.1 C6.1 C7.1 C8.1 C9.1 C10.1 C11.1 C12.1 C13.1 C14.1 C15.1 C16.1 C17.2 C18.1 C19.2 C20.2 C21.2 C22.2 C23.2 C24.1 C25.1 C26.1 C27.1 C28.1 C29.1 C30.1 C31.1 C32.1 C33.1 C34.1 C35.1 C36.2 C37.1 C38.1 C39.2 C41.1 C42.1 C43.1 C44.2 C45.2 C46.1 C47.1 C48.1 C49.2 C50.2 C51.2 C52.2 C53.2 C54.1 C55.1 C56.2 DA1.4 DA1.8 DA1.9 DA2.2 DA3.9 DA3.11 DA4.11 DA4.19 DA4.20 DA4.21 DD1.11 DD1.15 DD1.31 DD1.41 DD1.55 DD1.72 DD1.83 DD1.97 DD2.4 DD3.4 DD4.2 J1.1 QR2.3 R3.2 R6.2 R7.1 R8.1 R12.1 R13.2 R16.1 R17.1 R18.1 R22.1 R23.1 R24.1 VD1.3 VD2.1 VD4.1 VD6.1 VD7.1 VD8.1 X1.1 X9.1 XP1.1 XP2.15 XP3.3 XP3.4 XP3.11 XP3.12 XP3.13 XP3.14 XP3.15 XP3.16 | length 63.8
  Top Layer w0.2: DA1.9 105.85,75.025 105.9,75.075 ; DA1.8 106.35,75.287 ; DA1.4 106.85,71.386 107.137,71.1 ; DA3.11 v2(114.6,103.625) DA3.9 119.075,103.625 C47.1 ; C51.2 125.05,94.35 125.7,95 DA4.19 ; C49.2 127.25,93.4 127.45,93.6 DA4.20 ; DA4.11 127.45,99.756
  Top Layer w0.4: v1(80.4,64.3) C27.1 ; C26.1 88.525,64.325 88.8,64.05 v1(88.8,63.6) ; v1(91.1,63.6) 91.1,63.75 91.5,64.15 C30.1 ; C28.1 99.6,66.1 99.45,66.25 v1(99.45,66.3) ; DD3.4 104.94,82.74 v1(104.975,82.775) ; C47.1 C48.1 ; v1(124.1,93) C51.2 ; v1(124.4,88.3) C38.1 126.1,88.4 C39.2 ; v1(126,92.6) 126.025,92.575 C49.2 ; v1(127.7,86.9) C39.2 ; DA2.2 129.125,89.125 128.4,88.4 C39.2 ; C50.2 132.15,92.15 v1(132.2,92.1) ; v1(134.3,93.4) C36.2 135.95,92.05 C37.1 v1(136,93.4) ; v1(135.8,112.35) 135.85,112.4 C44.2
  Bottom Layer w0.2: DD1.83 118.5,67.1 ; DD1.97 118.9,74.1 ; 120.3,63.3 120.35,63.25 DD1.72 ; 123.8,75.75 123.85,75.8 DD1.11 ; 123.85,74.875 123.925,74.8 ; 125.85,75.801 DD1.15 ; DD1.55 128.85,63.499 ; 130.8,68.1 DD1.41 ; 131.1,73.1 DD1.31
  Bottom Layer w0.4: DD2.4 v1(105.4,86.55) ; C56.2 112.65,84.45 v1(112.7,84.5) ; C55.1 v1(114.501,71.65) ; VD2.1 119.139,91.216 119.773,91.849 R6.2 120.949,91.849 121.1,92 C22.2 ; v1(135.1,60.45) C54.1
  other v1: 137.8,53.25 74.4,53.85 145.95,54 135,55 83.7,55.05 83.716,59.1 90.7,60.45 115.05,60.7 132.45,62 140.2,63.45 112.5,64.2 129.3,64.65 120.801,64.75 75,65 125,65 80.5,66.2 129.8,67.6 145.3,67.6 120.051,67.65 91.7,67.8 124.9,67.9 90,68.3 139.6,69.3 106.575,69.35 129.65,69.45 77.5,70 81.4,70.9 110.55,71.9 122,71.9 129.15,71.9 135.7,72.3 124.9,73.6 119.901,73.65 110.55,73.9 86.6,73.925 139.7,73.95 145.1,73.95 129.6,74.6 80,75 120,75 126.3,75.15 103.4,76 106.5,76 109.2,77.4 132.45,78 89.475,78.275 109.2,79.4 134.55,79.4 77.5,80 82.5,80 112.5,80 142.5,80 116.3,80.2 132.1,80.55 136,81.15 111.2,81.25 125.7,81.95 144.75,82.2 132.1,82.525 123.9,83.25 127.4,83.35 125.7,83.7 120.2,84.4 118.851,84.75 75,85 80,85 115.95,85.3 128.6,85.65 131.15,85.65 132.95,85.65 88.2,85.9 113.3,86.55 131.2,86.7 145.35,87.3 85.6,87.45 101.45,87.6 104.25,88.35 82.5,90 107.5,90 142.5,90 102.6,91 127.2,91.475 115.95,91.6 137.4,92.1 112.35,92.6 104.1,92.7 145.35,92.7 130.95,93.5 125.5,93.75 140.4,94.2 102.6,94.225 75,95 80,95 144.45,95.9 146.1,97.8 110.3,97.95 116.1,97.95 111.8,98.7 114.8,98.8 112.5,100 114.15,100 127.8,100.4 112,101 113.55,101 114.8,101 128.5,101.4 100.5,102.15 127.5,102.15 128.7,102.75 125,103.65 126.4,103.65 121.65,103.7 75,105 90,105 95,105 120,105 128.7,105.45 114.3,106.6 131.55,107.6 109.95,108 112.2,108.45 116.1,108.5 129.3,109.5 116.6,109.95 112.5,110 111.5,111.3 88.9,111.5 86.7,111.827 109.675,113.25 137.2,113.5 83.25,114.4 146.1,114.6 111.45,115.123
  other v2: 128.7,79.35 127.7,95.75 128.7,95.75 127.7,96.75 128.7,96.75 127.7,97.75 128.7,97.75 113.6,102.625 114.6,102.625 113.6,103.625
GPS_ON: DD1.67 XP2.7 | length 34.3
  Top Layer w0.2: v2(122.6,53.4) v2(122.6,60.4)
  Bottom Layer w0.2: XP2.7 99.021,53.4 v2(122.6,53.4) ; v2(122.6,60.4) 122.85,60.65 DD1.67
GPS_RST: DD1.64 XP2.8 | length 31
  Top Layer w0.2: XP2.8 98.711,56.25 108.05,56.25 110.8,59 v2(115.5,59)
  Bottom Layer w0.2: v2(115.5,59) 123.784,59 124.35,59.566 DD1.64
GPS_RX: DD1.48 XP2.6 | length 53.3
  Top Layer w0.2: v2(111.5,55.5) v2(115,55.5)
  Bottom Layer w0.2: XP2.6 100.064,59.989 101.575,61.5 106.049,61.5 111.5,56.049 v2(111.5,55.5) ; v2(115,55.5) 114.8,55.5 115.1,55.2 131.866,55.2 136.6,59.934 136.6,63.9 135.9,64.6 DD1.48
GPS_TX: C54.2 DD1.49 XP2.5 | length 52.4
  Top Layer w0.2: v2(110.6,56.1) 115.7,56.1 v2(116,55.8)
  Bottom Layer w0.2: XP2.5 101.4,56.233 101.4,60.475 101.975,61.05 105.65,61.05 v2(110.6,56.1) ; v2(116,55.8) 131.9,55.8 136.2,60.1 136.2,63.4 136,63.6 C54.2 134.35,63.6 133.85,64.1 DD1.49
GSM_ON: DD1.45 XP3.5 | length 67.1
  Top Layer w0.2: v2(113.3,69.9) 125.4,69.9 128.6,66.7 133.9,66.7 v2(134.3,66.3)
  Bottom Layer w0.2: XP3.5 100.064,93.864 99.575,93.375 99.575,69.598 101.273,67.9 111.251,67.9 113.251,69.9 v2(113.3,69.9) ; DD1.45 134.1,66.1 v2(134.3,66.3)
H+: C25.2 L3.2 X5.1 | length 13
  Top Layer w0.4: L3.2 C25.2 85.675,68.05 v1@86.6,68.975 ; v1(86.6,71.3) 88.85,73.55 91.525,73.55
  Top Layer w0.5: v1@86.6,68.975 v1(86.6,69)
  Bottom Layer w0.4: v1(86.6,69) v1(86.6,71.3)
H-: C24.2 L2.2 X6.1 | length 13.1
  Top Layer w0.4: L2.2 C24.2 83.55,67.7 86.3,70.45 92.325,70.45
M+: C28.2 L4.1 X7.1 | length 19.7
  Top Layer w0.4: X7.1@96.5,79.775 96.725,79.55 97.95,79.55 99.625,77.875 99.625,68.425 98.475,67.275 96.8,67.275 96.575,67.05 C28.2 L4.1
M-: C29.2 L5.1 R8.2 X8.1 | length 17.7
  Top Layer w0.4: L5.1 C29.2 ; R8.2 95.75,67.725 96.25,68.225 98.275,68.225 98.85,68.8 98.85,75.675 97.975,76.55 X8.1
  Top Layer w0.5: C29.2@94.524,66.098 R8.2
MIC_HF+: C31.2 L4.2 XP2.12 | length 10.1
  Top Layer w0.4: XP2.12 92.444,58.769 93.125,59.45 95.45,59.45 96.575,60.575 L4.2 C31.2
MIC_HF-: C30.2 L5.2 XP2.11 | length 12.1
  Top Layer w0.4: XP2.11 91.182,56.159 91.182,59.057 93.1,60.975 94.25,60.975 94.525,61.25 L5.2 C30.2
MISO: DA1.1 DD1.61 DD2.2 DD3.2 | length 61
  Top Layer w0.2: v2(102.775,71.05) 102.8,71.025 105.114,71.025 105.35,71.261 DA1.1 ; DD3.2 103.155,85.3 101.5,85.3 100.9,84.7 v2(100.9,84) v2(100.9,73.2) 100.9,67.9 104.5,64.3 v2(106,64.3)
  Bottom Layer w0.2: v2(100.9,73.2) 100.9,72.925 v2(102.775,71.05) ; v2(100.9,84) 100.91,84.01 DD2.2 ; v2(106,64.3) 106.4,63.9 108.434,63.9 114.734,57.6 124.081,57.6 125.85,59.369 DD1.61
MOSI: DA1.2 DD1.60 DD2.5 DD3.5 | length 63.5
  Top Layer w0.2: v2(102.35,74.575) 102.35,79.85 103.8,81.3 106,81.3 v2(106.5,81.8) 107.44,82.74 DD3.5 ; v2@105.28,70.003 105.28,70.555 105.85,71.125 DA1.2 ; v2(105.3,66) v2(105.3,70)
  Bottom Layer w0.2: v2(102.35,74.575) 102.35,73.75 105.28,70.82 v2@105.28,70.003 ; v2(105.3,66) 105.3,64 105.8,63.5 108.2,63.5 114.5,57.2 124.247,57.2 126.35,59.303 DD1.60 ; v2(106.5,81.8) 106.1,82.2 106.1,85.35 107.3,86.55 DD2.5
NetC1_2: C1.2 DD1.22 QR1.1 | length 7.7
  Bottom Layer w0.2: DD1.22 129.35,78.875 130.1,79.625 QR1.1
  Bottom Layer w0.5: C1.2 129.425,83.725 130.1,83.05 QR1.1
NetC2_2: C2.2 DD1.23 QR1.2 | length 10.6
  Bottom Layer w0.2: DD1.23 129.85,78.575 130.2,78.925 132.775,78.925 134.1,80.25 QR1.2
  Bottom Layer w0.5: QR1.2 134.1,83.025 134.725,83.65 C2.2
NetC3_2: C3.2 DD1.17 J1.2 R1.2 | length 21.9
  Top Layer w0.2: v2(126.675,78.95) 127.325,78.3 131.2,78.3 136.7,83.8 139.085,83.8 J1.2
  Top Layer w0.3: R1.2@139.885,82.164 J1.2 ; R1.2 C3.2@141.55,82.15
  Top Layer w0.5: R1.2@139.885,82.164 R1.2
  Bottom Layer w0.2: v2(126.675,78.95) 126.85,78.775 DD1.17
NetC4_2: C4.2 DD1.16 QR2.2 | length 4.7
  Bottom Layer w0.2: C4.2@123.9,80.25 QR2.2 125.2,79.425 126.35,78.275 DD1.16
NetC5_2: C5.2 DD1.18 QR2.1 | length 4.2
  Bottom Layer w0.2: QR2.1 127.325,80.25 C5.2@127.35,80.225 ; DD1.18 C5.2@127.35,80.225 ; C5.2 C5.2@127.35,80.225
NetC6_2: C6.2 DD1.53 R2.2 XP2.16 | length 58.7
  Top Layer w0.2: XP2.16 85.7,55.773 85.7,54.05 86.35,53.4 106.5,53.4 110.9,57.8 v2(112.4,57.8)
  Bottom Layer w0.2: v2(112.4,57.8) 113.8,56.4 129.65,56.4 130.9,57.65 R2.2 130.9,59.676 129.85,60.725 DD1.53
  Bottom Layer w0.5: R2.2 C6.2
NetC15_2: C15.2 C16.2 DD1.10 DD1.12 L1.2 | length 9.6
  Top Layer w0.5: L1.2 C16.2 ; v2(123.325,78.7) C16.2 ; v2(124.35,78.7) 124.875,78.175 C15.2 C16.2
  Bottom Layer w0.2: DD1.10 v2@123.35,78.8 ; DD1.12 124.35,78.575 124.3,78.625 124.35,78.675 v2(124.35,78.7)
NetC34_2: C34.2 FU3.2 L6.1 | length 8
  Top Layer w1: L6.1 77.32,99.42 FU3.2
  Bottom Layer w1: C34.2 v3(77.3,102.3)
NetC35_2: C35.2 L6.2 VD3.1 | length 12.6
  Top Layer w1: L6.2 v3(81.1,102.1) v3(82.3,102.1)
  Bottom Layer w1: C35.2 v3(81.1,102.1) v3(82.3,102.1) 84.75,102.1 85.4,102.75 VD3.1
NetC40_1: C40.1 DA3.1 | length 4.2
  Top Layer w0.2: v1(111.2,104.9) 110.9,104.6 110.9,104.3 111.075,104.125 DA3.1
  Bottom Layer w0.4: v1(111.2,104.9) 111.6,105.3 113.15,105.3 C40.1@113.35,105.5
NetC40_2: C40.2 DA3.10 L7.1 VD7.2 | length 12.6
  Top Layer w0.2: DA3.10 117.225,104.125 117.3,104.2
  Top Layer w0.4: 117.3,104.2 v1@117.5,104.4
  Top Layer w0.75: v1@117.5,104.4 118.2,105.1 118.2,106.5
  Top Layer w1: VD7.2 118.2,106.5 120.642,106.5 L7.1
  Bottom Layer w0.4: C40.2 117.05,105.3 v1(117.75,104.6)
NetC46_2: C46.2 DA3.4 | length 4.4
  Top Layer w0.25: C46.2 108.8,101.9 109.525,102.625 DA3.4
NetC47_2: C47.2 DA3.8 R15.2 | length 5
  Top Layer w0.2: DA3.8 117.575,103.125 118.2,102.5 118.2,102.2 118.45,101.95 C47.2
  Top Layer w0.3: R15.2 119.1,100.474 C47.2
NetC48_2: C48.2 R15.1 | length 1.6
  Top Layer w0.3: C48.2 120.575,101.875 R15.1
NetC49_1: C49.1 DA4.1 | length 2
  Top Layer w0.2: C49.1 DA4.1
NetC52_1: C52.1 DA4.5 DA4.6 XP1.2 | length 18
  Top Layer w0.2: DA4.5 130.997,96.5 130.997,97 DA4.6
  Bottom Layer w1: v3(132.6,96.8) v3(133.5,97.7) C52.1 XP1.2
NetC53_1: C53.1 DA4.13 R24.2 | length 5.5
  Top Layer w0.2: C53.1 R24.2 124.975,98.725 125.7,98 DA4.13
NetDA2_4: DA2.4 R9.1 R12.2 | length 3.2
  Top Layer w0.4: DA2.4 134.05,88.175 R9.1 R12.2 R12.2
NetDA3_5: DA3.5 R16.2 | length 2.7
  Top Layer w0.25: R16.2 110.35,101.875 110.6,102.125 DA3.5
NetDA3_7: DA3.7 R14.1 R17.2 | length 4.5
  Top Layer w0.2: DA3.7 117.275,102.625 117.5,102.4 R14.1
  Top Layer w0.4: R17.2 R14.1
NetDA4_7: DA4.7 R19.2 | length 6.2
  Top Layer w0.2: DA4.7 131.5,97.5 134.1,100.1 R19.2
NetDA4_8: DA4.8 R21.2 | length 4.8
  Top Layer w0.2: DA4.8 131,98 132.7,99.7 R21.2
NetDA4_9: DA4.9 R20.2 | length 3.5
  Top Layer w0.2: DA4.9 130.65,98.5 131.25,99.1 R20.2
NetDA4_10: DA4.10 R23.2 | length 2.4
  Top Layer w0.2: DA4.10 128.95,99.55 129.8,100.4 R23.2
NetDA4_12: DA4.12 R22.2 | length 3.6
  Top Layer w0.2: R22.2 126.375,100.275 125.6,99.5 125.6,98.8 125.9,98.5 DA4.12
NetDA4_14: DA4.14 R18.2 | length 6.4
  Top Layer w0.2: R18.2 122.175,99.925 124.6,97.5 DA4.14
NetDD4_6: DD4.6 FU2.1 VD1.2 | length 11.8
  Bottom Layer w0.4: VD1.2 84.65,82.95 85.26,82.34 DD4.6 85.26,79.615 85.5,79.375 89.575,79.375 90.125,79.925 FU2.1
NetDD4_7: DD4.7 FU1.1 VD1.1 | length 10.8
  Bottom Layer w0.4: DD4.7 VD1.1@86.53,83.843 ; VD1.1@86.55,83.863 86.55,86.125 87.875,87.45 89.75,87.45 90.1,87.1 90.1,85.55 FU1.1
  Bottom Layer w0.5: DD4.7 DD4.7@86.55,81.208 ; VD1.1@86.53,83.843 VD1.1@86.55,83.863
NetDD4_8: DD4.8 R3.1 | length 2.1
  Bottom Layer w0.4: DD4.8 87.8,82.2 88.175,82.575 R3.1
NetR10_1: R10.1 R11.1 VD6.3 | length 6.9
  Bottom Layer w0.4: R10.1 VD6.3 92.3,110.1 93,109.4 R11.1
NetR10_2: R10.2 VD3.2 VD4.2 VD5.3 VT1.2 VT2.2 | length 27.3
  Top Layer w0.5: VT1.2 89.16,109.24 89.6,108.8
  Top Layer w1: 89.6,108.8 89.6,108.1 VD4.2
  Bottom Layer w0.4: VD3.2 86,106.85 84.25,108.6 R10.2 84.25,111.25 85.85,112.85 VT2.2 92.097,112.85 VD5.3
  Bottom Layer w1: VD3.2 90.85,106.85 VD4.2
NetR11_2: R11.2 VT2.1 | length 16.9
  Bottom Layer w0.4: VT2.1 91.65,114.75 92.1,115.2 98.6,115.2 98.9,114.9 98.9,110.05 98.25,109.4 R11.2
NetR13_1: R13.1 VD5.1 VT1.1 VT2.3 | length 13.7
  Top Layer w0.4: v1(85.8,113.8) VT1.1
  Bottom Layer w0.4: v1(85.8,113.8) VT2.3 94.395,113.8 94.411,113.816 95.616,113.816 95.95,114.15 R13.1
PWRMON: DD1.40 XP3.6 | length 70.2
  Top Layer w0.2: v2(113.3,70.7) 133.7,70.7 134.5,69.9 v2(134.5,68.6)
  Bottom Layer w0.2: XP3.6 101.3,98.201 101.3,94.464 100.025,93.189 100.025,70.1 101.825,68.3 110.8,68.3 113.2,70.7 v2(113.3,70.7) ; DD1.40 v2(134.5,68.6)
RESET: DD1.44 XP3.7 | length 64.5
  Top Layer w0.2: v2(113.3,69.1) 125.634,69.1 128.634,66.1 v2(131.1,66.1)
  Bottom Layer w0.2: XP3.7 97.524,95.237 99.125,93.636 99.125,69.411 101.036,67.5 111.7,67.5 v2(113.3,69.1) ; v2(131.1,66.1) 131.6,66.6 DD1.44
RXD: C55.2 DD1.85 XP3.10 | length 51.8
  Bottom Layer w0.2: XP3.10 96.25,98.171 96.25,95.875 98.675,93.45 98.675,69.225 100.8,67.1 112.2,67.1 113.6,68.5 C55.2 115.5,68.5 115.9,68.1 DD1.85
RXD0: DD1.99 XP2.2 | length 26
  Top Layer w0.2: v2@104.1,60.223 v2(104.1,60.3) 105,61.2 106.2,61.2 111.7,66.7 111.7,72.5 v2(113,73.8)
  Bottom Layer w0.2: v2(104.1,60.3) 104.1,60.2 105.144,59.156 XP2.2 ; v2(113,73.8) 114.3,75.1 DD1.99
SCK: DA1.12 DD1.62 DD2.6 DD3.6 | length 63.1
  Top Layer w0.2: v2(102.8,72.1) 102.8,72.611 103.264,73.075 DA1.12 ; v2(107.2,64.5) 106.8,64.9 104.466,64.9 101.6,67.766 v2(101.6,73.9) 101.6,79.8 103.575,81.775 105.346,81.775 107.581,84.01 DD3.6
  Bottom Layer w0.2: v2(101.6,73.9) 101.6,73.3 v2(102.8,72.1) ; v2@106.8,83.2 v2(106.8,83.25) 106.8,85 107.08,85.28 DD2.6 ; v2(107.2,64.5) 107.4,64.3 108.6,64.3 114.9,58 123.916,58 125.35,59.434 DD1.62
SS0: DA1.10 DD1.63 | length 39.8
  Top Layer w0.2: DA1.10 105.35,75 105.15,75.2 104.225,75.2 102.1,73.075 102.1,67.831 104.631,65.3 107.975,65.3 v2(108.375,64.9)
  Bottom Layer w0.2: v2(108.375,64.9) 108.6,64.9 115.1,58.4 123.75,58.4 124.85,59.5 DD1.63
SS1: DD1.59 DD3.1 | length 55.9
  Top Layer w0.2: v2(101.5,66) 100.3,67.2 100.3,85.1 101.75,86.55 DD3.1
  Bottom Layer w0.2: v2(101.5,66) 104.4,63.1 108,63.1 114.3,56.8 124.413,56.8 126.85,59.237 DD1.59
SS2: DD1.95 DD2.1 | length 24.7
  Bottom Layer w0.2: DD2.1 101.74,82.74 101.5,82.5 101.5,81.8 102.2,81.1 109.1,81.1 111.5,78.7 111.5,74.2 113,72.7 115.65,72.7 116.05,73.1 DD1.95
STAT_LED: DD1.66 XP2.9 | length 38.2
  Top Layer w0.2: v2(123.5,53.4) v2(123.5,60.4)
  Bottom Layer w0.2: XP2.9 96.881,53 121.6,53 121.8,52.8 122.9,52.8 v2(123.5,53.4) ; DD1.66 123.35,60.55 v2(123.5,60.4)
TXD: DD1.82 XP3.9 | length 49.3
  Bottom Layer w0.2: XP3.9 94.984,95.966 98.225,92.725 98.225,68.775 100.4,66.6 100.734,66.6 112.116,66.6 DD1.82
TXD0: DD1.98 XP2.1 | length 27.3
  Top Layer w0.2: v2(105.3,60.3) 105.901,60.3 112.7,67.099 112.7,72.2 v2(113.8,73.3)
  Bottom Layer w0.2: XP2.1 106.65,56.403 106.65,58.952 v2(105.3,60.3) v2(105.3,60.3) ; v2(113.8,73.3) 115.1,74.6 DD1.98
V_SD: C44.1 C45.1 C50.1 DA4.4 L7.2 R14.2 R19.1 R20.1 R21.1 VD8.2 XP2.10 | length 25.6
  Top Layer w0.2: DA4.4 130.6,96
  Top Layer w0.3: 130.6,96 131.45,95.15 C50.1
  Top Layer w0.4: R14.2 118.651,99.051 v1(118.7,99.1) ; R20.1 R21.1 R19.1 135.549,102.549
  Top Layer w0.5: C50.1 133.25,95.15
  Bottom Layer w0.4: v1(118.7,99.1) 127.5,107.9 v1(127.5,111.8)
  other v1: 133.7,111.6 132.5,113.6
V_SYSTEM: C23.1 DD1.6 R4.1 R7.2 | length 7.9
  Top Layer w0.3: C23.1 118.825,81.776 R7.2 R4.1 ; v2(120.3,80.8) R7.2
  Bottom Layer w0.2: v2(120.3,80.8) 121.35,79.75 DD1.6
V_VIN: C22.1 DD1.7 R5.1 R6.1 VD2.3 | length 20.5
  Bottom Layer w0.2: C22.1 121.85,90.25 DD1.7
  Bottom Layer w0.3: R5.1 114.334,90.266 VD2.3 120.266,90.266 R6.1 C22.1
VCC: C38.2 C39.1 C51.1 DA2.1 DA2.3 DA4.15 DA4.16 DA4.17 R4.2 XP3.1 XP3.2 | length 18.4
  Top Layer w0.2: DA4.17 125.6,96 125.5,96.1 125.5,96.5 ; DA4.16 125.5,96.5 ; DA4.15 125.7,97 125.5,96.8 125.5,96.5
  Top Layer w0.3: R4.2 121.8,89.85 ; DA2.3 130.925,88.175 131.125,88.375 131.125,89.825 130.875,90.075 DA2.1
  Top Layer w0.5: C38.2 C39.1 127.725,90.075 DA2.1
VIN: C32.2 C33.2 FU3.1 X2.1 X10.1 | length 0
  Top Layer w0.5: C32.2@100.197,90.497 C32.2@100.2,90.5
VIN_F: C41.2 C42.2 C43.2 DA3.2 R5.2 VT1.3 | length 20
  Top Layer w0.2: 110.725,103.625 DA3.2
  Top Layer w0.5: v1@110,103.6 v1@110.025,103.625 ; v1(110,103.65) v1@110.025,103.625 ; 110.725,103.625 v1@110.025,103.625
  Bottom Layer w0.4: C42.2 108.75,102.25 108.3,101.8 108.3,92.35 110.35,90.3 R5.2
  Bottom Layer w0.5: C42.2 v1(110,103.65)
pads on no net: DA1.5 DA1.6 DA1.11 DA3.3 DA3.6 DA4.2 DA4.3 DA4.18 DD1.1 DD1.2 DD1.3 DD1.4 DD1.5 DD1.8 DD1.9 DD1.13 DD1.14 DD1.19 DD1.20 DD1.21 DD1.24 DD1.25 DD1.26 DD1.27 DD1.29 DD1.30 DD1.32 DD1.33 DD1.34 DD1.35 DD1.36 DD1.37 DD1.38 DD1.43 DD1.50 DD1.51 DD1.52 DD1.56 DD1.57 DD1.58 DD1.65 DD1.68 DD1.69 DD1.70 DD1.73 DD1.74 DD1.75 DD1.76 DD1.77 DD1.78 DD1.79 DD1.80 DD1.81 DD1.86 DD1.87 DD1.88 DD1.89 DD1.90 DD1.91 DD1.92 DD1.93 DD1.94 DD1.100 REPER1.1 REPER2.1 REPER3.1 REPER4.1 VD5.2 VD6.2 XP1.3 XP3.8

## Polygon pours and split planes (outlines as drawn)
+3V on Top Layer "+3V_L01_P032" (hatched 90Degree grid 0.15 track 0.2, remove dead copper, pour order 32): 133.6,90.5 137.8,90.5 137.8,84.725 135.125,84.725 135.125,89 134.925,89.2 133.6,89.2
VIN on Top Layer "VIN_L01_P034" (hatched 90Degree grid 0.15 track 0.2, remove dead copper, pour order 34): 95.2,94.3 100.475,94.3 100.575,94.3 101.025,93.85 101.025,89.5 98.95,89.5 98.05,90.4 90.3,90.4 89.4,89.5 86,89.5 83.5,92 83.5,102.8 83,103.3 81.9,103.3 80.6,104.6 80.6,106.2 85.3,106.2 85.3,94.3 87.45,94.3 91.25,94.3
NetC52_1 on Top Layer "Top Layer-No Net 1" (hatched Horizontal grid 0.15 track 0.2, remove dead copper, pour order 50): 130.6,96.3 133,96.3 134.475,97.775 134.05,98.2 133.1,98.2 131.9,97 130.7,97 130.7,96.9 130.6,96.8
VCC on Top Layer "Top Layer-No Net 1" (hatched Horizontal grid 0.15 track 0.2, remove dead copper, pour order 56): 125.5,95.425 123,95.425 122.088,94.512 122.088,92.5 123.544,91.044 125,91.044 125,89.588 121.5,89.588 116.575,94.512 104.85,94.512 103.95,95.412 103.95,100.775 104.5,101.325 104.525,101.3 107.3,101.3 107.6,101 107.6,98.05 108.65,97 125.5,97
V_SD on Top Layer "Top Layer-No Net 1" (hatched Horizontal grid 0.15 track 0.2, remove dead copper, pour order 54): 114.5,115.5 133.5,115.5 134.4,114.6 134.4,110.9 137.7,107.6 137.7,96.6 135.6,94.5 133,94.5 133,95.5 135.3,97.8 135.3,105.6 130.2,110.7 127.6,110.7 126.25,112.05 114.5,112.05
VIN_F on Top Layer "Top Layer-No Net 1" (hatched Horizontal grid 0.15 track 0.2, remove dead copper, pour order 52): 90.6,115.499 90.6,108.7 92.3,107 99.55,107 103.25,103.3 110.25,103.3 110.25,105.1 109,105.1 108.6,105.5 108.6,115.4
GND on Top Layer "GND_L01_P062" (hatched 90Degree grid 0.15 track 0.2, remove dead copper, pour order 62): 72.644,116.197 147.644,116.197 147.644,52.197 72.644,52.197
GND on Bottom Layer "GND_L04_P058" (hatched 90Degree grid 0.15 track 0.2, remove dead copper, pour order 58): 72.644,116.197 147.644,116.197 147.644,52.197 72.644,52.197
GND on GND (split plane): 147.134,52.707 73.154,52.707 73.154,115.687 147.134,115.687
+3V on VCC (split plane): 147.134,52.707 97.252,52.707 97.252,59 97.244,59.065 97.218,59.126 97.178,59.178 95.678,60.678 95.626,60.718 95.565,60.744 95.5,60.752 84.604,60.752 81.652,63.704 81.652,104.396 87.504,110.248 147.134,110.248
V_SD on VCC (split plane): 147.134,110.752 87.4,110.752 87.335,110.744 87.274,110.718 87.244,110.696 87.222,110.678 81.222,104.678 81.182,104.626 81.156,104.565 81.148,104.5 81.148,63.6 81.156,63.535 81.182,63.474 81.222,63.422 84.322,60.322 84.374,60.282 84.435,60.256 84.5,60.248 95.396,60.248 96.748,58.896 96.748,52.707 73.154,52.707 73.154,115.687 147.134,115.687

## Keep-outs
Keep-Out Layer:
  the board outline again, w0.2

## Other copper
Top Layer:
  rectangle net CANH: 90.464,84.3 97.464,86.8
  rectangle net CANL: 90.464,81.325 97.464,83.825
  rectangle net M+: 90.464,78.325 97.464,80.825
  rectangle net M-: 90.464,75.325 97.464,77.825
  rectangle net H+: 90.464,72.325 97.464,74.825
  rectangle net H-: 90.464,69.325 97.464,71.825
  pour cut-out: 104.35,75.075 107.425,75.075 108.05,74.45 108.05,71.3 104.502,71.3 104.325,71.477 104.325,75.05
  pour cut-out: 78.075,102.15 78.125,102.1 78.912,102.235 79.65,102.1 79.65,95.5 79.625,95.475 79.575,95.525 78.762,95.302 78.05,95.525
  pour cut-out: 117.5,108.962 117.2,110.3 117.5,111.587 125.975,111.587 126.275,110.3 126.019,109.106 125.875,108.962
  pour cut-out: 127.8,95.175 127.125,95.175 127.125,93.725 127.8,93.725
  pour cut-out: 127.125,98.325 127.8,98.325 127.8,99.763 127.113,99.763 127.113,99.6
Bottom Layer:
  pour cut-out: 90.35,87.05 93.225,87.05 93.225,84.1 90.35,84.1
  pour cut-out: 90.325,83.5 93.2,83.5 93.2,80.55 90.325,80.55
VCC (plane layer: these items are gaps in the copper):
  lines w0.5: 97,52.197 97,59 95.5,60.5 84.5,60.5 81.4,63.6 81.4,104.5 87.4,110.5 147.644,110.5

## Silkscreen, mask and mechanical layers (free items; w line width, h text height)
Top Overlay:
  lines w0.2: 104.15,104.15 105.4,104.15 ; 104.75,103.55 104.75,104.8
  text "BATTERY" at 138.45,100.05 h1
  text "+VIN" at 83.4,90.975 h1.5
  text "GND" at 83.2,88 h1.5
  text "CANH" at 82.05,85.1 h1.5
  text "CANL" at 83.4,81.9 h1.5
  text "MIC+" at 83.4,79.075 h1.5
  text "MIC-" at 83.4,75.975 h1.5
  text "EAR+" at 83.1,72.9 h1.5
  text "EAR-" at 83.25,69.4 h1.5
TOP mark:
  text "S6_main_hv3_TOP" at 83.725,46.025 h3.5
BOT mark:
  text "S6_main_hv3_BOT" at 133.5,46.1 h3.5